# Altium PCB OMD_60V_REF.PcbDoc
Units mm, origin at the board's own origin, x right, y up, seen from the top; angles counter-clockwise.
Board outline 152.4 x 101.6 mm, 4 copper layers (Top Layer, L2, L3, Bottom Layer), stack 1.567 mm thick; 128 components, 119 nets, 652 pads, 0 vias.
Unrouted connection lines stored in the file: 377.
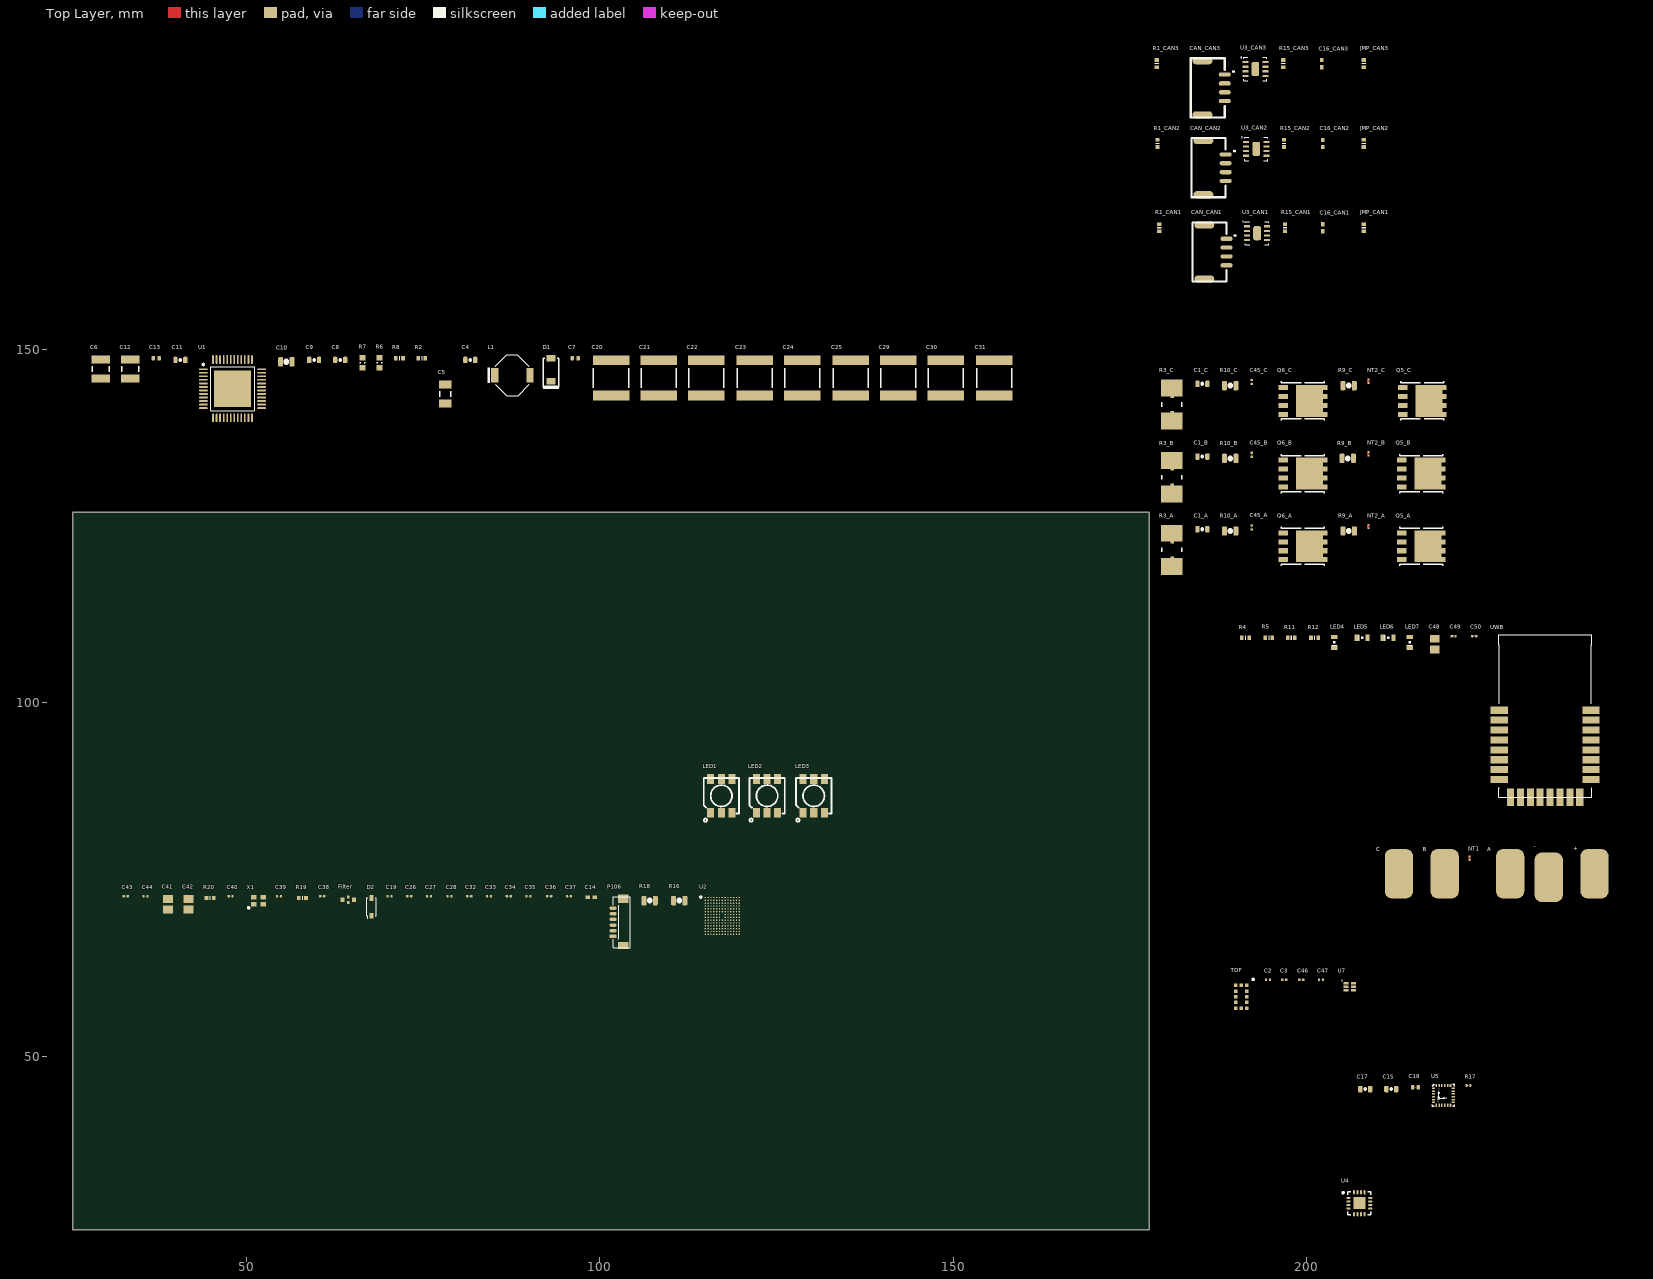
[diagram p0: Top Layer view]
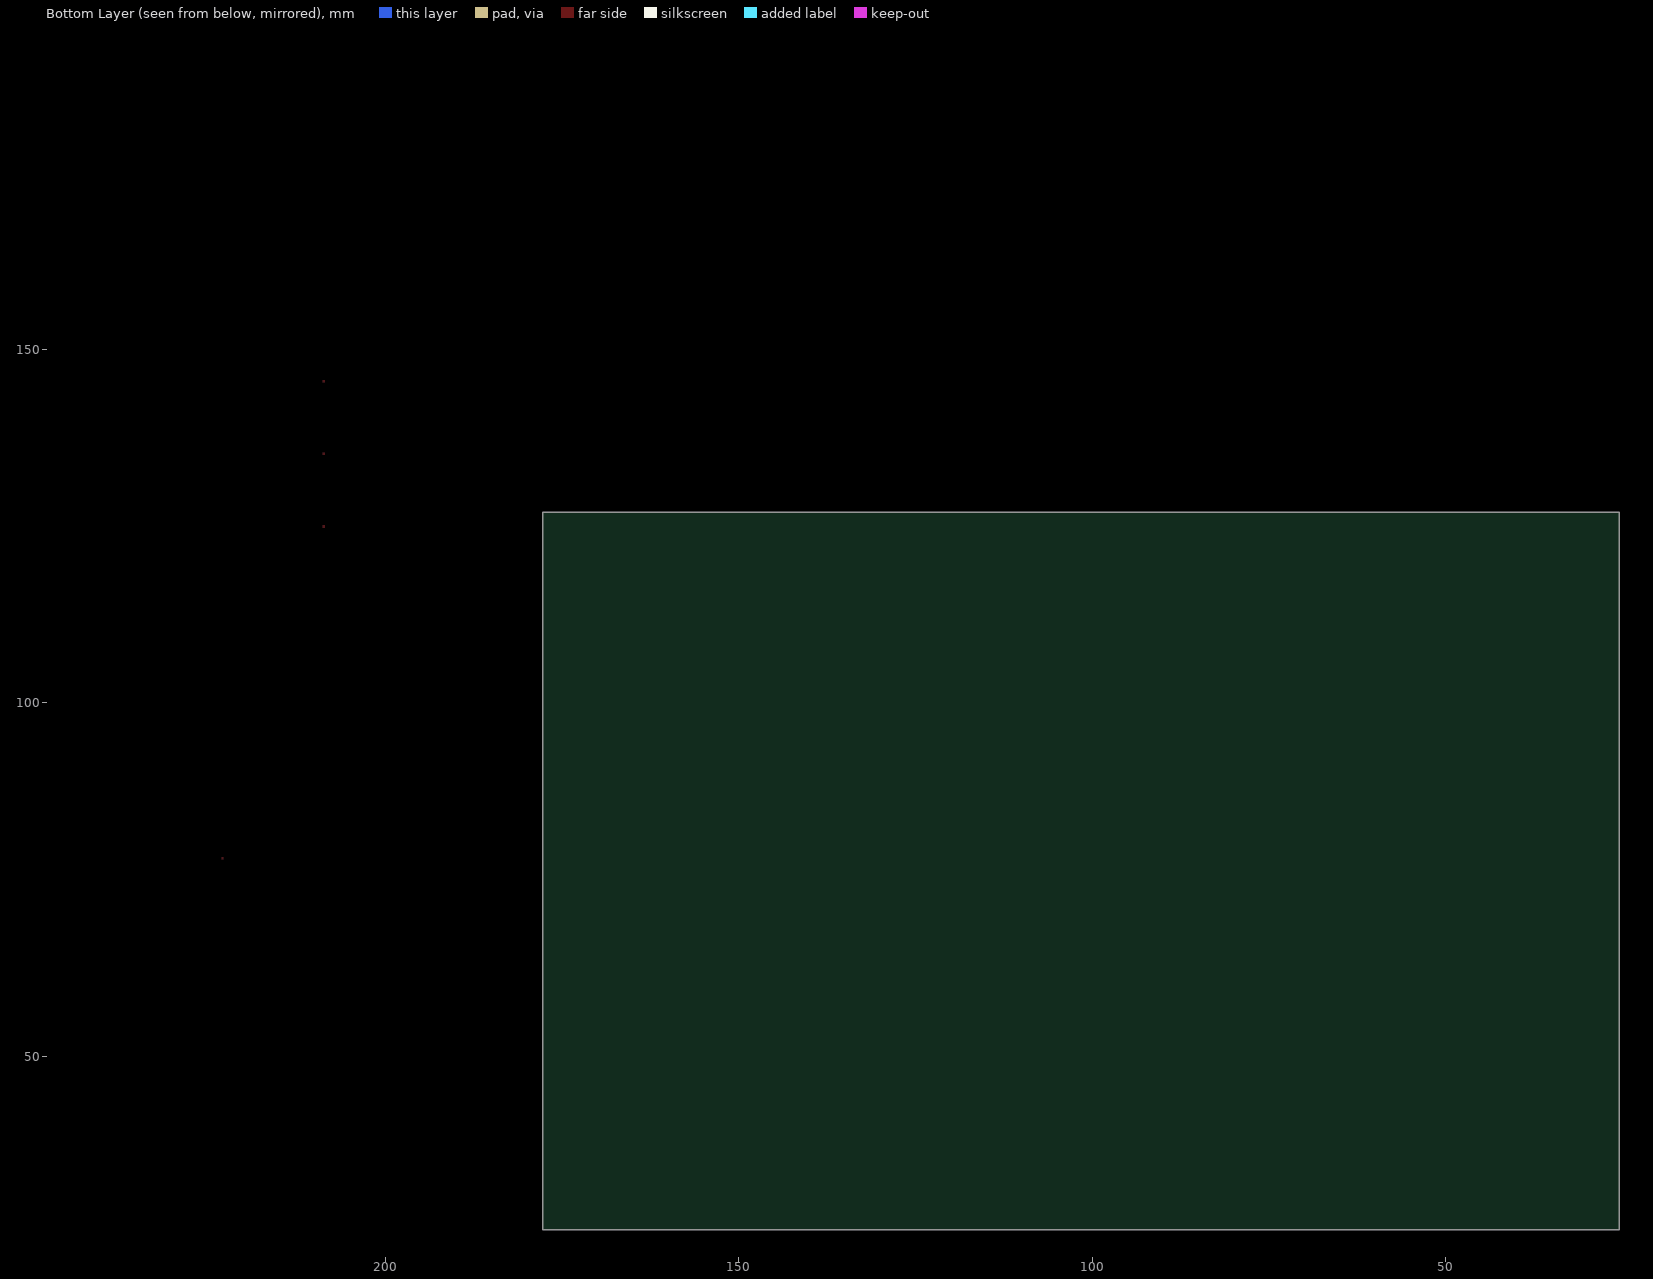
[diagram p1: Bottom Layer view, seen from below]

## Layer stack, top to bottom
Top Solder: solder mask 0.0102, Solder Resist, Dk 3.5
Top Layer: signal copper 0.0356
Dielectric 1: dielectric 0.012, Polyamide, Dk 3.4
L2: signal copper 0.036
Dielectric 4: dielectric 0.012, Polyamide, Dk 3.4
L3: signal copper 0.036
Dielectric 2: core 1.4, FR-4, Dk 4.2
Bottom Layer: signal copper 0.0356
Bottom Solder: solder mask 0.0102, Solder Resist, Dk 3.5

## Board outline
25.4,25.4 177.8,25.4 177.8,127 25.4,127

## Design rules (kind name [scope] priority, off if disabled: settings)
Clearance [All] p1: gap=0.254 ignorepadtopadclearanceinfootprint=FALSE except(0: Arc-Hole Track-Hole SMDPad-Hole THPad-Hole Via-Hole Fill-Hole Poly-Hole Region-Hole Text-Hole)
PolygonConnect [All] p1: connectstyle=Relief reliefconductorwidth=0.254 reliefentries=4 polygonreliefangle="90 Angle" airgapwidth=0.254
RoomDefinition UWB [InComponentClass('UWB')] p1: confinementstyle=ConfineIn formatcopy=TRUE lockcomponents=FALSE outline 190.246,85.205 241.808,85.205 241.808,111.113 190.246,111.113
RoomDefinition TOF [InComponentClass('TOF')] p2: confinementstyle=ConfineIn formatcopy=TRUE lockcomponents=FALSE outline 189.13,55.745 208.053,55.745 208.053,62.476 189.13,62.476
RoomDefinition OMD_F7_CAN_60V_layout [InComponentClass('OMD_F7_CAN_60V_layout')] p3: confinementstyle=ConfineIn formatcopy=TRUE lockcomponents=FALSE outline 209.753,71.526 243.027,71.526 243.027,79.654 209.753,79.654
RoomDefinition LED [InComponentClass('LED')] p4: confinementstyle=ConfineIn formatcopy=TRUE lockcomponents=FALSE outline 111.228,82.918 133.072,82.918 133.072,91.427 111.228,91.427
RoomDefinition IMU [InComponentClass('IMU')] p5: confinementstyle=ConfineIn formatcopy=TRUE lockcomponents=FALSE outline 206.948,42.545 224.093,42.545 224.093,47.498 206.948,47.498
RoomDefinition F7_MCU [InComponentClass('F7_MCU')] p6: confinementstyle=ConfineIn formatcopy=TRUE lockcomponents=FALSE outline 32.123,64.897 120.388,64.897 120.388,74.295 32.123,74.295
RoomDefinition ENC [InComponentClass('ENC')] p7: confinementstyle=ConfineIn formatcopy=TRUE lockcomponents=FALSE outline 204.712,26.898 209.792,26.898 209.792,32.613 204.712,32.613
RoomDefinition DRIVER_60V [InComponentClass('DRIVER_60V')] p8: confinementstyle=ConfineIn formatcopy=TRUE lockcomponents=FALSE outline 27.686,139.399 158.75,139.399 158.75,150.702 27.686,150.702
RoomDefinition CAN3 [InComponentClass('CAN3')] p9: confinementstyle=ConfineIn formatcopy=TRUE lockcomponents=FALSE outline 178.054,182.491 212.344,182.491 212.344,193.032 178.054,193.032
RoomDefinition CAN2 [InComponentClass('CAN2')] p10: confinementstyle=ConfineIn formatcopy=TRUE lockcomponents=FALSE outline 178.181,171.188 212.344,171.188 212.344,181.729 178.181,181.729
RoomDefinition CAN1 [InComponentClass('CAN1')] p11: confinementstyle=ConfineIn formatcopy=TRUE lockcomponents=FALSE outline 178.435,159.25 212.217,159.25 212.217,169.791 178.435,169.791
RoomDefinition C [InComponentClass('C')] p12: confinementstyle=ConfineIn formatcopy=TRUE lockcomponents=FALSE outline 178.943,138.43 220.218,138.43 220.218,147.447 178.943,147.447
RoomDefinition B [InComponentClass('B')] p13: confinementstyle=ConfineIn formatcopy=TRUE lockcomponents=FALSE outline 178.943,128.143 220.091,128.143 220.091,137.16 178.943,137.16
RoomDefinition A [InComponentClass('A')] p14: confinementstyle=ConfineIn formatcopy=TRUE lockcomponents=FALSE outline 178.943,117.856 220.091,117.856 220.091,126.873 178.943,126.873
RoutingVias [All] p1: holewidth=0.711 width=1.27 viastyle="Through Hole" minholewidth=0.711 minwidth=1.27 maxholewidth=0.711 maxwidth=1.27
SolderMaskExpansion [All] p1: expansion=0.102
Width [All] p1: maxlimit=0.254 minlimit=0.254 preferedwidth=0.254
30 further rules are at their usual default settings.

## Classes and differential pairs
component class CAN1: C16_CAN1 CAN_CAN1 JMP_CAN1 R1_CAN1 R15_CAN1 U3_CAN1
component class CAN2: C16_CAN2 CAN_CAN2 JMP_CAN2 R1_CAN2 R15_CAN2 U3_CAN2
component class CAN3: C16_CAN3 CAN_CAN3 JMP_CAN3 R1_CAN3 R15_CAN3 U3_CAN3
component class OMD_F7_CAN_60V_layout: + - A B C NT1
channel class OMD_CAN: CAN1 CAN2 CAN3
component class A: C1_A C45_A NT2_A Q5_A Q6_A R3_A R9_A R10_A
component class B: C1_B C45_B NT2_B Q5_B Q6_B R3_B R9_B R10_B
component class C: C1_C C45_C NT2_C Q5_C Q6_C R3_C R9_C R10_C
component class DRIVER_60V: C4 C5 C6 C7 C8 C9 C10 C11 C12 C13 C20 C21 C22 C23 C24 C25 C29 C30 C31 D1 L1 R2 R6 R7 R8 U1
component class ENC: U4
component class F7_MCU: C14 C19 C26 C27 C28 C32 C33 C34 C35 C36 C37 C38 C39 C40 C41 C42 C43 C44 D2 Filter P106 R16 R18 R19 R20 U2 X1
component class IMU: C15 C17 C18 R17 U5
component class LED: LED1 LED2 LED3
component class TOF: C2 C3 C46 C47 TOF U7
component class UWB: C48 C49 C50 LED4 LED5 LED6 LED7 R4 R5 R11 R12 UWB
channel class OMD_Fets_40A: A B C

## Components (designator, comment, footprint, x,y, rotation, side; value= is the part's Value field where it differs from the comment)
+ "BATT" MOTOR_PLUG_F_3.5 242.265,77.368 r0 top
- "GND" MOTOR_PLUG_F_3.5 235.788,76.86 r0 top
A "Motor_pad" MOTOR_PLUG_F_3.5 230.327,77.368 r0 top
B "Motor_pad" MOTOR_PLUG_F_3.5 221.056,77.368 r0 top
C "Motor_pad" MOTOR_PLUG_F_3.5 214.579,77.368 r0 top
C1_A "PartNumber" 0603-CAP 185.293,124.587 r0 top value=1000pF (schematic designator C1)
C1_B "PartNumber" 0603-CAP 185.293,134.874 r0 top value=1000pF (schematic designator C1)
C1_C "PartNumber" 0603-CAP 185.293,145.161 r0 top value=1000pF (schematic designator C1)
C2 "22uF" 0201-cap 194.591,60.825 r0 top
C3 "4u7" 0201-cap 196.877,60.825 r0 top
C4 "PartNumber" 0603-CAP 81.661,148.543 r0 top value=0.1uF
C5 "PartNumber" 1206_180L 78.105,143.717 r90 top value=22uF
C6 "PartNumber" 1210L 29.337,147.273 r90 top value=2.2uF
C7 "0u1" 0402-CAP 96.52,148.797 r0 top
C8 "PartNumber" 0603-CAP 63.246,148.543 r0 top value=1uF
C9 "PartNumber" 0603-CAP 59.563,148.543 r0 top value=0.047uF
C10 "1u" 0805-CAP 55.626,148.289 r0 top
C11 "PartNumber" 0603-CAP 40.64,148.543 r0 top value=1uF
C12 "PartNumber" 1210_270L 33.528,147.273 r90 top value=4.7uF
C13 "0u1" 0402-CAP 37.211,148.797 r0 top
C14 "CAP CER 10000PF 50V X7R 0402" CAPC1005L 98.798,72.517 r0 top value=10nF
C15 "2u2" 0603-CAP 212.028,45.339 r0 top
C16_CAN1 "Cap" CAPC1005L 202.311,167.251 r90 top value=1uF (schematic designator C16)
C16_CAN2 "Cap" CAPC1005L 202.311,179.189 r90 top value=1uF (schematic designator C16)
C16_CAN3 "Cap" CAPC1005L 202.184,190.492 r90 top value=1uF (schematic designator C16)
C17 "2u2" 0603-CAP 208.345,45.339 r0 top
C18 "0u1" 0402-CAP 215.457,45.593 r0 top
C19 "0u1" 0201-cap 70.223,72.644 r0 top
C20 "Cap" CAPC5750L 101.6,146.003 r90 top value=15uF
C21 "Cap" CAPC5750L 108.331,146.003 r90 top value=15uF
C22 "Cap" CAPC5750L 115.062,146.003 r90 top value=15uF
C23 "Cap" CAPC5750L 121.92,146.003 r90 top value=15uF
C24 "Cap" CAPC5750L 128.651,146.003 r90 top value=15uF
C25 "Cap" CAPC5750L 135.509,146.003 r90 top value=15uF
C26 "0u1" 0201-cap 73.017,72.644 r0 top
C27 "0u1" 0201-cap 75.811,72.644 r0 top
C28 "0u1" 0201-cap 78.732,72.644 r0 top
C29 "Cap" CAPC5750L 142.24,146.003 r90 top value=15uF
C30 "Cap" CAPC5750L 148.971,146.003 r90 top value=15uF
C31 "Cap" CAPC5750L 155.829,146.003 r90 top value=15uF
C32 "0u1" 0201-cap 81.526,72.644 r0 top
C33 "0u1" 0201-cap 84.32,72.644 r0 top
C34 "0u1" 0201-cap 87.114,72.644 r0 top
C35 "0u1" 0201-cap 89.908,72.644 r0 top
C36 "0u1" 0201-cap 92.829,72.644 r0 top
C37 "0u1" 0201-cap 95.623,72.644 r0 top
C38 "0u1" 0201-cap 60.698,72.644 r0 top
C39 "8p" 0201-cap 54.602,72.644 r0 top
C40 "8p" 0201-cap 47.744,72.644 r0 top
C41 "GRM21BR60G107ME15L" C0805 38.854,71.501 r90 top value=100uF
C42 "GRM21BR60G107ME15L" C0805 41.775,71.501 r90 top value=100uF
C43 "2u2" 0201-cap 32.885,72.644 r0 top
C44 "2u2" 0201-cap 35.679,72.644 r0 top
C45_A "0u1" 0201-cap 192.278,124.841 r90 top (schematic designator C45)
C45_B "0u1" 0201-cap 192.278,135.128 r90 top (schematic designator C45)
C45_C "0u1" 0201-cap 192.278,145.415 r90 top (schematic designator C45)
C46 "1u" 0201-cap 199.29,60.825 r0 top
C47 "0u1" 0201-cap 202.084,60.825 r0 top
C48 "GRM21BR60G107ME15L" C0805 218.186,108.319 r90 top value=100uF
C49 "1u" 0201-cap 220.853,109.462 r0 top
C50 "0u1" 0201-cap 223.774,109.462 r0 top
CAN_CAN1 "JST_GH_H4" JST_GH_H4 183.261,163.822 r90 top (schematic designator CAN)
CAN_CAN2 "JST_GH_H4" JST_GH_H4 183.134,175.76 r90 top (schematic designator CAN)
CAN_CAN3 "JST_GH_H4" JST_GH_H4 183.007,187.063 r90 top (schematic designator CAN)
D1 "PartNumber" SOD-123FL 93.091,147.146 r90 top value=100V
D2 "Schottky barrier diode" SOD323 67.683,71.12 r90 top value=30V
Filter "Filter" NFM18CC 64.381,72.136 r0 top value=2.2uF
JMP_CAN1 "solder" R0402 208.153,167.251 r90 top (schematic designator JMP)
JMP_CAN2 "solder" R0402 208.153,179.189 r90 top (schematic designator JMP)
JMP_CAN3 "solder" R0402 208.153,190.492 r90 top (schematic designator JMP)
L1 "PartNumber" SD53 87.63,146.384 r0 top value=15uH
LED1 "?" UBLED 117.197,86.855 r90 top
LED2 "?" UBLED 123.674,86.855 r90 top
LED3 "?" UBLED 130.278,86.855 r90 top
LED4 "AMBER" 0603-LED 203.962,108.573 r90 top
LED5 "AMBER" 0603-LED 207.899,109.208 r0 top
LED6 "AMBER" 0603-LED 211.582,109.208 r0 top
LED7 "AMBER" 0603-LED 214.63,108.573 r90 top
NT1 "Net-Tie" Net-Tie_10mil 223.088,78.003 r90 top net-tie
NT2_A "Net-Tie" Net-Tie_10mil 208.788,124.968 r90 top net-tie (schematic designator NT2)
NT2_B "Net-Tie" Net-Tie_10mil 208.788,135.255 r90 top net-tie (schematic designator NT2)
NT2_C "Net-Tie" Net-Tie_10mil 208.788,145.542 r90 top net-tie (schematic designator NT2)
P106 "JST_SUR_6" JST_SUR_H6 103.878,68.961 r90 top
Q5_A "MOSFET-N" Q5B 216.281,122.174 r0 top (schematic designator Q5)
Q5_B "MOSFET-N" Q5B 216.281,132.461 r0 top (schematic designator Q5)
Q5_C "MOSFET-N" Q5B 216.408,142.748 r0 top (schematic designator Q5)
Q6_A "MOSFET-N" Q5B 199.517,122.174 r0 top (schematic designator Q6)
Q6_B "MOSFET-N" Q5B 199.517,132.461 r0 top (schematic designator Q6)
Q6_C "MOSFET-N" Q5B 199.517,142.748 r0 top (schematic designator Q6)
R1_CAN1 "RES SMD 120 OHM 5% 1/16W 0402" R0402 179.197,167.251 r90 top value=120R (schematic designator R1)
R1_CAN2 "RES SMD 120 OHM 5% 1/16W 0402" R0402 178.943,179.189 r90 top value=120R (schematic designator R1)
R1_CAN3 "RES SMD 120 OHM 5% 1/16W 0402" R0402 178.816,190.492 r90 top value=120R (schematic designator R1)
R2 "RES SMD 10K OHM 5% 1/16W 0402" 0402-RES 74.803,148.797 r0 top value=10K
R3_A "Current sense resistor" 4RESC5125X09N 180.975,121.666 r90 top value=0.001R (schematic designator R3)
R3_B "Current sense resistor" 4RESC5125X09N 180.975,131.953 r90 top value=0.001R (schematic designator R3)
R3_C "Current sense resistor" 4RESC5125X09N 180.975,142.24 r90 top value=0.001R (schematic designator R3)
R4 "220R" 0402-RES 191.389,109.208 r0 top
R5 "220R" 0402-RES 194.691,109.208 r0 top
R6 "PartNumber" 0603L 68.834,148.162 r90 top value=28.0k
R7 "PartNumber" 0603L 66.421,148.162 r90 top value=8.45k
R8 "RES SMD 10K OHM 5% 1/16W 0402" 0402-RES 71.628,148.797 r0 top value=10K
R9_A "RES" R0805 205.994,124.333 r0 top value=18k (schematic designator R9)
R9_B "RES" R0805 205.867,134.62 r0 top value=18k (schematic designator R9)
R9_C "RES" R0805 205.994,144.907 r0 top value=18k (schematic designator R9)
R10_A "RES" R0805 189.23,124.333 r0 top value=1k (schematic designator R10)
R10_B "RES" R0805 189.23,134.62 r0 top value=1k (schematic designator R10)
R10_C "RES" R0805 189.23,144.907 r0 top value=1k (schematic designator R10)
R11 "220R" 0402-RES 197.866,109.208 r0 top
R12 "220R" 0402-RES 201.168,109.208 r0 top
R15_CAN1 "RES SMD 120 OHM 5% 1/16W 0402" R0402 196.977,167.251 r90 top value=120R (schematic designator R15)
R15_CAN2 "RES SMD 120 OHM 5% 1/16W 0402" R0402 196.85,179.189 r90 top value=120R (schematic designator R15)
R15_CAN3 "RES SMD 120 OHM 5% 1/16W 0402" R0402 196.723,190.492 r90 top value=120R (schematic designator R15)
R16 "RES" R0805 111.244,72.009 r0 top value=18k
R17 "3R" 0201-RES 222.95,45.847 r0 top
R18 "RES" R0805 107.053,72.009 r0 top value=1k
R19 "10K" 0402-RES 57.904,72.39 r0 top
R20 "1K" 0402-RES 44.823,72.39 r0 top
TOF "VL53L0X" VL53L0X 190.781,58.412 r90 top
U1 "DRV8323R" PQFP-G48 48.006,144.479 r0 top
U2 "STM32F769AI" WLCSP180 117.34,69.85 r0 top
U3_CAN1 "CAN" SON65P300X100_HS-9N 193.04,166.489 r0 top (schematic designator U3)
U3_CAN2 "CAN" SON65P300X100_HS-9N 192.913,178.427 r0 top (schematic designator U3)
U3_CAN3 "CAN" SON65P300X100_HS-9N 192.786,189.73 r0 top (schematic designator U3)
U4 "MA700" QFN16 207.506,29.184 r0 top
U5 "ICM20649" ICM20649 219.394,44.45 r0 top
U7 "NCV8154" NCV8154 206.148,59.809 r0 top
UWB "DWM1000" DWM1000 233.807,98.159 r0 top
X1 "Crystal Oscillator in SMD 1.6 x 1.2" OSCILLATOR-1.6x1.2 51.681,72.009 r0 top

## Footprints (in the part's own frame and the unit in brackets; to place one, negate y for a bottom-side part, rotate by r counter-clockwise, add the part's x,y. Pads: shape width x height; smd on the part's side, far side on the other; paste and mask are expansions set on the pad)
4RESC5125X09N [mm] "Chip Resistor, 2-Leads + Kelvin terminals, Body 5.1x2.5mm, IPC Medium Density"
  rect 2.4x3.05 smd: 1(-2.35,0) 2(2.35,0)
  rect 0.5x0.5 smd: S1(-1.175,-0.025) S2(1.175,-0.025)
  silkscreen extent -0.3,-1.42 0.3,1.43, body extent -2.67,-1.4 2.66,1.4, height 0.89
0201-cap [mm]
  rrect50% 0.32x0.36 smd mask+0: 1(-0.28,0) 2(0.28,0)
  silkscreen extent 0,-0.01 0,0.03, body extent -0.3,-0.15 0.3,0.15, height 0.3
0201-RES [mm]
  rrect50% 0.32x0.36 smd mask+0: 1(-0.28,0) 2(0.28,0)
  silkscreen extent 0,-0.01 0,0.03, body extent -0.3,-0.15 0.3,0.15, height 0.12
0402-CAP [mil]
  rrect50% 20x24 smd mask+0: P$1(-15.75,0) P$2(15.75,0)
  silkscreen extent 0,0 0,1, body extent -20,-10 20,10, height 20
0402-RES [mil] "0402-RES"
  rect 20x24 smd: 1(-19.68,0) 2(20,0)
  silkscreen extent -3,-12 3,12, body extent -20,-10 20,10, height 20
0603-CAP [mil] "0603-CAP"
  rrect50% 24x36 smd mask+0: 1(-27.56,0) 2(27.56,0)
  silkscreen extent 0,-2 0,2, body extent -31,-16 31,16, height 34
0603-LED [mil]
  rect 24x36 smd: A(30,0) C(-29.53,0)
  silkscreen extent -15,-15 5,15
0603L [mm] "0603 from SM-752 data"
  rect 0.8x0.85 smd: 1(-0.7,0) 2(0.7,0)
  silkscreen extent -0.07,-0.33 0.07,0.33, body extent -0.87,-0.47 0.87,0.47, height 1
0805-CAP [mil]
  rrect50% 28x52 smd mask+0: 1(-31.5,0) 2(31.5,0)
  silkscreen extent 0,-2 0,2, body extent -39,-25 39,25, height 31
1206_180L [mm] "1206_180"
  rect 1.1x1.75 smd: 1(-1.35,0) 2(1.35,0)
  silkscreen extent -0.4,-0.77 0.4,0.77, body extent -1.75,-0.95 1.75,0.95, height 1.8
1210_270L [mm] "1210"
  rect 1.1x2.6 smd: 1(-1.35,0) 2(1.35,0)
  silkscreen extent -0.4,-1.2 0.4,1.2, body extent -1.7,-1.35 1.7,1.35, height 2.7
1210L [mm] "1210 from SM-752 data"
  rect 1.1x2.6 smd: 1(-1.35,0) 2(1.35,0)
  silkscreen extent -0.4,-1.2 0.4,1.2, body extent -1.7,-1.35 1.7,1.35, height 1.35
C0805 [mm] "Chip Capacitor, Body 2.0x1.3mm, IPC High Density"
  rect 1.1x1.4 smd: 1(-0.75,0) 2(0.75,0)
  body extent -1.1,-0.72 1.1,0.72, height 1.4
CAPC1005L [mm] "Chip Capacitor, Body 1.0x0.5mm, IPC High Density"
  rect 0.6x0.5 smd: 1(-0.5,0) 2(0.5,0)
  body extent -0.55,-0.3 0.55,0.3, height 0.6
CAPC5750L [mm] "Chip Capacitor, Body 5.7x5.0mm, IPC High Density"
  rect 1.4x5.2 smd: 1(-2.5,0) 2(2.5,0)
  silkscreen extent -1.4,-2.5 1.4,2.5, body extent -2.95,-2.63 2.95,2.63, height 1.35
DWM1000 [mm] "DWM1000"
  rect 2.45x1 smd mask+0.05: 1(-6.5,0.8) 2(-6.5,-0.6) 3(-6.5,-2) 4(-6.5,-3.4) 5(-6.5,-4.8) 6(-6.5,-6.2) 7(-6.5,-7.6) 8(-6.5,-9) 17(6.5,-9) 18(6.5,-7.6) 19(6.5,-6.2) 20(6.5,-4.8) 21(6.5,-3.4) 22(6.5,-2) 23(6.5,-0.6) 24(6.5,0.8)
  rect 1x2.45 smd mask+0.05: 9(-4.9,-11.5) 10(-3.5,-11.5) 11(-2.1,-11.5) 12(-0.7,-11.5) 13(0.7,-11.5) 14(2.1,-11.5) 15(3.5,-11.5) 16(4.9,-11.5)
  silkscreen extent -6.6,-11.5 6.6,11.5
ICM20649 [mm] "ICM20649"
  rrect70% 0.457x0.229 smd mask+0.05: 1(-1.4,1.016) 6(-1.4,-1) 13(1.4,-1) 18(1.4,1.016)
  rrect50% 0.457x0.229 smd mask+0.05: 2(-1.4,0.61) 3(-1.4,0.203) 4(-1.4,-0.2) 5(-1.4,-0.6) 14(1.4,-0.6) 15(1.4,-0.2) 16(1.4,0.203) 17(1.4,0.61)
  rrect70% 0.229x0.457 smd mask+0.05: 7(-1,-1.4) 12(1.016,-1.4) 24(-1,1.4)
  rrect50% 0.229x0.457 smd mask+0.05: 8(-0.6,-1.4) 9(-0.2,-1.4) 10(0.203,-1.4) 11(0.61,-1.4) 20(0.61,1.4) 21(0.203,1.4) 22(-0.2,1.4) 23(-0.6,1.4)
  rrect90% 0.229x0.457 smd mask+0.05: 19(1.016,1.4)
  silkscreen extent -1.55,-1.55 1.57,1.57
JST_GH_H4 [mil]
  rrect100% 24x67 smd: 1(74,-214.57) 2(25,-214.57) 3(-24.61,-214.57) 4(-73.82,-214.57)
  rrect100% 40x111 smd: GND(-150.59,-90.55) GND(151,-90.55)
  silkscreen extent -164,-215 165,-25, body extent -162,-234 163,-43, height 170
JST_SUR_H6 [mm]
  rect 0.5x1 smd: 1(-2,2)
  rrect100% 0.5x1 smd: 2(-1.2,2) 3(-0.4,2) 4(0.4,2) 5(1.2,2) 6(2,2)
  rect 1x1.5 smd: GND(-3.3,0.585)
  rect 1.2x1.5 smd: GND(3.3,0.585)
  silkscreen extent -3.6,-0.4 3.6,2, body extent -3.5,-0.4 3.5,2.3, height 1.7
MOTOR_PLUG_F_3.5 [mm]
  rrect50% 4x7 smd: 1(-1.473,-1.549)
NCV8154 [mm] "ldo 1.8v 2.8v"
  rect 0.73x0.35 smd: 1(-0.535,0.5) 2(-0.535,0) 3(-0.535,-0.5) 4(0.535,-0.5) 5(0.535,0) 6(0.535,0.5)
  silkscreen extent -1.16,0.84 -1.06,0.94
Net-Tie_10mil [mil] "10mil net tie, no solder mask opening, no solder paste"
  rect 10x10 smd paste-5 mask-5: 1(-10,0) 2(10,0)
  Top Layer region: -6,5 6,5 6,-5 -6,-5
NFM18CC [mm] "Chip Capacitor, 3-Leads, Body 1.6x0.8mm"
  rect 0.55x0.6 smd: 1(-0.825,0) 3(0.825,0)
  rect 0.4x0.4 smd: 2(0,-0.4) 2(0,0.4)
  body extent -0.85,-0.45 0.85,0.45, height 0.7
OSCILLATOR-1.6x1.2 [mm] "OSCILLATOR-1.6x1.2"
  rect 0.75x0.6 smd: 1(-0.675,-0.5) 2(0.675,-0.5) 3(0.675,0.5) 4(-0.675,0.5)
  silkscreen extent -1.5,-1.12 -1.3,-0.91
PQFP-G48 [mm] "TSQFP, 48-Leads, Body 7.00x7.00mm, Pitch 0.50mm, Thermal Pad 5.17x5.17mm, IPC High Density"
  oval 1.25x0.25 smd: 1(-4.125,2.75) 2(-4.125,2.25) 3(-4.125,1.75) 4(-4.125,1.25) 5(-4.125,0.75) 6(-4.125,0.25) 7(-4.125,-0.25) 8(-4.125,-0.75) 9(-4.125,-1.25) 10(-4.125,-1.75) 11(-4.125,-2.25) 12(-4.125,-2.75) 25(4.125,-2.75) 26(4.125,-2.25) 27(4.125,-1.75) 28(4.125,-1.25) 29(4.125,-0.75) 30(4.125,-0.25) 31(4.125,0.25) 32(4.125,0.75) 33(4.125,1.25) 34(4.125,1.75) 35(4.125,2.25) 36(4.125,2.75)
  oval 0.25x1.25 smd: 13(-2.75,-4.125) 14(-2.25,-4.125) 15(-1.75,-4.125) 16(-1.25,-4.125) 17(-0.75,-4.125) 18(-0.25,-4.125) 19(0.25,-4.125) 20(0.75,-4.125) 21(1.25,-4.125) 22(1.75,-4.125) 23(2.25,-4.125) 24(2.75,-4.125) 37(2.75,4.125) 38(2.25,4.125) 39(1.75,4.125) 40(1.25,4.125) 41(0.75,4.125) 42(0.25,4.125) 43(-0.25,4.125) 44(-0.75,4.125) 45(-1.25,4.125) 46(-1.75,4.125) 47(-2.25,4.125) 48(-2.75,4.125)
  rect 5.17x5.17 smd: 49(0,0)
  silkscreen extent -4.25,-3.1 3.1,3.55, body extent -3.5,-3.5 3.5,3.5, height 1.05
Q5B [mm] "TI Q5B, 8-Leads, Body 5.1x6.1mm (max), Pitch 1.27mm, IPC Medium Density"
  rect 3.85x4.52 smd: D(0.95,0)
  rect 1.37x0.71 smd: D(2.77,-1.905) D(2.77,-0.635) D(2.77,0.635) D(2.77,1.905) G(-2.77,-1.905) S(-2.77,-0.635) S(-2.77,0.635) S(-2.77,1.905)
  silkscreen extent -3.05,-2.76 3.05,2.76, body extent -3.05,-2.55 3.05,2.55, height 1.05
QFN16 [mm]
  oval 0.6x0.25 smd: 1(-1.55,0.75) 2(-1.55,0.25) 3(-1.55,-0.25) 4(-1.55,-0.75) 9(1.55,-0.75) 10(1.55,-0.25) 11(1.55,0.25) 12(1.55,0.75)
  oval 0.25x0.6 smd: 5(-0.75,-1.55) 6(-0.25,-1.55) 7(0.25,-1.55) 8(0.75,-1.55) 13(0.75,1.55) 14(0.25,1.55) 15(-0.25,1.55) 16(-0.75,1.55)
  rect 1.7x1.7 smd: 17(0,0)
  silkscreen extent -2.42,-1.65 1.65,1.65, body extent -1.5,-1.5 1.5,1.5, height 0.9
R0402 [mil]
  rect 20x24 smd: 1(-19.69,0) 2(20,0)
  silkscreen extent -3,-12 3,12, body extent -20,-10 20,10, height 12
R0805 [mil]
  rrect50% 28x52 smd mask+0: 1(-31.5,0) 2(31.5,0)
  silkscreen extent 0,-2 0,2, body extent -39,-25 39,24, height 20
SD53 [mm] "COOPER BUSSMAN"
  rect 1x2 smd: 1(-2.5,0) 2(2.5,0)
  silkscreen extent -3.5,-2.9 2.4,2.9, body extent -2.86,-2.86 2.86,2.86, height 3.01
SOD323 [mil] "SOD323"
  rect 32x24 smd: A(50,0) C(-49.21,0)
  silkscreen extent -62,-26 50,26, body extent -49,-24 49,25, height 35
SOD-123FL [mm] "Copied from SOD-123"
  rect 0.915x1.22 smd: 1(-1.637,0) 2(1.637,0)
  silkscreen extent -2.74,-1.16 1.68,1.16, body extent -1.9,-0.9 1.9,0.9, height 1
SON65P300X100_HS-9N [mm] "SON, 8-Leads, Body 3.00x3.00mm, Pitch 0.65mm, Thermal Pad 2.40x1.59mm, IPC Medium Density"
  rect 0.85x0.3 smd: 1(-1.42,0.975) 2(-1.42,0.325) 3(-1.42,-0.325) 4(-1.42,-0.975) 5(1.42,-0.975) 6(1.42,-0.325) 7(1.42,0.325) 8(1.42,0.975)
  rrect50% 1.1x2 smd paste-0.795: 2(0,0)
  silkscreen extent -2.05,-1.65 1.65,1.7, body extent -1.55,-1.55 1.55,1.55, height 1
UBLED [mm]
  rect 1.4x1 smd: 1(-2.4,1.5) 2(-2.4,0) 3(-2.4,-1.5) 4(2.4,1.5) 5(2.4,0) 6(2.4,-1.5)
  silkscreen extent -3.68,-2.5 2.5,2.5, body extent -2.73,-2.61 2.67,2.64, height 1.5
VL53L0X [mm] "LIDAR"
  rect 0.5x0.5 smd: 1(1.6,-0.8) 2(0.8,-0.8) 3(0,-0.8) 4(-0.8,-0.8) 5(-1.6,-0.8) 6(-1.6,0) 7(-1.6,0.8) 8(-0.8,0.8) 9(0,0.8) 10(0.8,0.8) 11(1.6,0.8) 12(1.6,0)
  silkscreen extent 2.34,-1.83 2.59,-1.58, body extent -2.2,-1.2 2.2,1.2, height 1
WLCSP180 [mil] "WLCSP, 180-Leads, Body 5.54x6.09mmx0.58mm, Pitch 0.40mm"
  round 7.5 smd mask+1.57: A1(-94.49,102.36) A2(-78.74,102.36) A3(-62.99,102.36) A4(-47.24,102.36) A5(-31.5,102.36) A6(-15.75,102.36) A7(0,102.36) A8(15.75,102.36) A9(31.5,102.36) A10(47.24,102.36) A11(62.99,102.36) A12(78.74,102.36) A13(94.49,102.36) B1(-94.49,86.61) B2(-78.74,86.61) B3(-62.99,86.61) B4(-47.24,86.61) B5(-31.5,86.61) B6(-15.75,86.61) B7(0,86.61) B8(15.75,86.61) B9(31.5,86.61) B10(47.24,86.61) B11(62.99,86.61) B12(78.74,86.61) B13(94.49,86.61) C1(-94.49,70.87) C2(-78.74,70.87) C3(-62.99,70.87) C4(-47.24,70.87) C5(-31.5,70.87) C6(-15.75,70.87) C7(0,70.87) C8(15.75,70.87) C9(31.5,70.87) C10(47.24,70.87) C11(62.99,70.87) C12(78.74,70.87) C13(94.49,70.87) D1(-94.49,55.12) D2(-78.74,55.12) D3(-62.99,55.12) D4(-47.24,55.12) D5(-31.5,55.12) D6(-15.75,55.12) D7(0,55.12) D8(15.75,55.12) D9(31.5,55.12) D10(47.24,55.12) D11(62.99,55.12) D12(78.74,55.12) D13(94.49,55.12) E1(-94.49,39.37) E2(-78.74,39.37) E3(-62.99,39.37) E4(-47.24,39.37) E5(-31.5,39.37) E6(-15.75,39.37) E7(0,39.37) E8(15.75,39.37) E9(31.5,39.37) E10(47.24,39.37) E11(62.99,39.37) E12(78.74,39.37) E13(94.49,39.37) F1(-94.49,23.62) F2(-78.74,23.62) F3(-62.99,23.62) F4(-47.24,23.62) F5(-31.5,23.62) F6(-15.75,23.62) F7(0,23.62) F8(15.75,23.62) F9(31.5,23.62) F10(47.24,23.62) F11(62.99,23.62) F12(78.74,23.62) F13(94.49,23.62) G1(-94.49,7.87) G2(-78.74,7.87) G3(-62.99,7.87) G4(-47.24,7.87) G5(-31.5,7.87) G6(-15.75,7.87) G8(15.75,7.87) G9(31.5,7.87) G10(47.24,7.87) G11(62.99,7.87) G12(78.74,7.87) G13(94.49,7.87) H1(-94.49,-7.87) H2(-78.74,-7.87) H3(-62.99,-7.87) H4(-47.24,-7.87) H5(-31.5,-7.87) H6(-15.75,-7.87) H8(15.75,-7.87) H9(31.5,-7.87) H10(47.24,-7.87) H11(62.99,-7.87) H12(78.74,-7.87) H13(94.49,-7.87) J1(-94.49,-23.62) J2(-78.74,-23.62) J3(-62.99,-23.62) J4(-47.24,-23.62) J5(-31.5,-23.62) J6(-15.75,-23.62) J7(0,-23.62) J8(15.75,-23.62) J9(31.5,-23.62) J10(47.24,-23.62) J11(62.99,-23.62) J12(78.74,-23.62) J13(94.49,-23.62) K1(-94.49,-39.37) K2(-78.74,-39.37) K3(-62.99,-39.37) K4(-47.24,-39.37) K5(-31.5,-39.37) K6(-15.75,-39.37) K7(0,-39.37) K8(15.75,-39.37) K9(31.5,-39.37) K10(47.24,-39.37) K11(62.99,-39.37) K12(78.74,-39.37) K13(94.49,-39.37) L1(-94.49,-55.12) L2(-78.74,-55.12) L3(-62.99,-55.12) L4(-47.24,-55.12) L5(-31.5,-55.12) L6(-15.75,-55.12) L7(0,-55.12) L8(15.75,-55.12) L9(31.5,-55.12) L10(47.24,-55.12) L11(62.99,-55.12) L12(78.74,-55.12) L13(94.49,-55.12) M1(-94.49,-70.87) M2(-78.74,-70.87) M3(-62.99,-70.87) M4(-47.24,-70.87) M5(-31.5,-70.87) M6(-15.75,-70.87) M7(0,-70.87) M8(15.75,-70.87) M9(31.5,-70.87) M10(47.24,-70.87) M11(62.99,-70.87) M12(78.74,-70.87) M13(94.49,-70.87) N1(-94.49,-86.61) N2(-78.74,-86.61) N3(-62.99,-86.61) N4(-47.24,-86.61) N5(-31.5,-86.61) N6(-15.75,-86.61) N7(0,-86.61) N8(15.75,-86.61) N9(31.5,-86.61) N10(47.24,-86.61) N11(62.99,-86.61) N12(78.74,-86.61) N13(94.49,-86.61) P1(-94.49,-102.36) P2(-78.74,-102.36) P3(-62.99,-102.36) P4(-47.24,-102.36) P5(-31.5,-102.36) P6(-15.75,-102.36) P7(0,-102.36) P8(15.75,-102.36) P9(31.5,-102.36) P10(47.24,-102.36) P11(62.99,-102.36) P12(78.74,-102.36) P13(94.49,-102.36)
  silkscreen extent -125,100 -115,110, body extent -108,-120 110,120

## Part data
+ - A B C: library part Socket, "Socket"
C1_A C1_B C1_C: library part GRM188R71C102KA01D, "CAP, CERM, 1000pF, 16V, +/-10%, X7R, 0603", Supplier Part Number 1=GRM188R71C102KA01D-ND, Supplier 1=Digi-Key
C2: library part CAP0805, "CAP CER 22UF 6.3V X5R 0402", Supplier Part Number 1=478-9839-2-ND, Supplier 1=Digi-Key
C3: library part CAP0603, "CAP CER 4.7UF 6.3V X5R 0201", Supplier Part Number 1=490-13230-2-ND, Supplier 1=Digi-Key
C4: library part 0603YC104JAT2A, "CAP, CERM, 0.1 µF, 16 V, +/- 5%, X7R, 0603", Supplier Part Number 1=478-3726-1-ND, Supplier 1=Digi-Key
C5: library part C3216X7S1A226M160AC, "CAP, CERM, 22 µF, 10 V, +/- 20%, X7S, 1206", Supplier Part Number 1=445-8035-1-ND, Supplier 1=Digi-Key
C6: library part HMK325B7225KN-T, "CAP, CERM, 2.2 µF, 100 V, +/- 10%, X7R, 1210", Supplier Part Number 1=587-1778-1-ND, Supplier 1=Digi-Key
C7 C13: library part CAP0402, "CAP CER 0.1UF 16V Y5V 0402", Supplier Part Number 1=490-10458-2-ND, Supplier 1=Digi-Key
C8 C11: library part GRM188R70J105KA01D, "CAP, CERM, 1 µF, 6.3 V, +/- 10%, X7R, 0603", Supplier Part Number 1=490-3898-1-ND, Supplier 1=Digi-Key
C9: library part C1608X7S2A473K080AB, "CAP, CERM, 0.047 µF, 100 V, +/- 10%, X7S, 0603", Supplier Part Number 1=445-6032-1-ND, Supplier 1=Digi-Key
C10: library part CAP0603, "CAP CER 1UF 16V Y5V 0603", Supplier Part Number 1=490-14464-2-ND, Supplier 1=Digi-Key
C12: library part GRM32ER71K475KE14L, "CAP, CERM, 4.7 µF, 80 V, +/- 10%, X7R, 1210", Supplier Part Number 1=490-9972-1-ND, Supplier 1=Digi-Key
C14: library part Cap, Supplier Part Number 1=445-6893-1-ND, Supplier 1=Digi-Key
C15 C17: library part CAP0603, "CAP CER 2.2UF 16V 10% X6S 0603", Supplier Part Number 1=445-7438-1-ND, Supplier 1=Digi-Key
C16_CAN1 C16_CAN2 C16_CAN3: "CAP CER 1UF 6.3V X5R 0402", Supplier Part Number 1=587-3766-1-ND, Supplier 1=Digi-Key
C18: library part CAP0402, "CAP CER 0.1UF 16V Y5V 0402", Supplier Part Number 1=311-1047-1-ND, Supplier 1=Digi-Key
C19 C26 C27 C28 C32 C33 C34 C35 C36 C37 C38 C45_A C45_B C45_C: library part CAP0402, "CAP CER 0.1UF 6V Y5V 0201", Supplier Part Number 1=490-10404-2-ND, Supplier 1=Digi-Key
C20 C21 C22 C23 C24 C25 C29 C30 C31: "Capacitor", Supplier Part Number 1=80X3236, Supplier 1=Newark
C39 C40: library part CAP0402, "CAP CER 8PF 50V NP0 0201", Supplier Part Number 1=490-13331-1-ND, Supplier 1=Digi-Key
C41 C42 C48: library part Capacitor, Supplier Part Number 1=490-10510-1-ND, Supplier 1=Digi-Key
C43 C44: library part CAP0402, "CAP CER 2u2uF 6V Y5V 0201", Supplier Part Number 1=490-13224-1-ND, Supplier 1=Digi-Key
C46 C49: library part CAP0603, "CAP CER 1UF 6.3V X5R 0201", Supplier Part Number 1=490-7229-2-ND, Supplier 1=Digi-Key
C47 C50: library part CAP0402, "CAP CER 0.1UF 16V Y5V 0402", Supplier Part Number 1=490-10404-2-ND, Supplier 1=Digi-Key
CAN_CAN1 CAN_CAN2 CAN_CAN3: "SM04B-GHS-TB", Supplier Part Number 1=455-1566-2-ND, Supplier 1=Digi-Key
D1: library part MBR1H100SFT3G, "Diode, Schottky, 100 V, 1 A, SOD-123FL", Supplier Part Number 1=MBR1H100SFT3GOSCT-ND, Supplier 1=Digi-Key
D2: library part DIODE-SCHOTTKY_SOD323, "DIODE SCHOTTKY 30V 0.03A SOD323", Supplier Part Number 1=RB751V40T1GOSCT-ND, Supplier 1=Digi-Key
Filter: library part NFM18CC222R1C3, "EMIFIL (Capacitor type) Single Circuit Type for Signal Lines", Supplier Part Number 1=490-6972-1-ND, Supplier 1=Digi-Key
JMP_CAN1 JMP_CAN2 JMP_CAN3: library part Resistor
L1: library part SD53-150-R, "Inductor, Shielded Drum Core, Ferrite, 15 µH, 1.1 A, 0.122 ohm, SMD", Supplier Part Number 1=513-1458-1-ND, Supplier 1=Digi-Key
LED1 LED2 LED3: library part UBLED, Supplier Part Number 1=PC5XS301V0500, Supplier 1=jeff_chang@ubleds.com.tw
LED4 LED5 LED6 LED7: library part LED0603, "LED 1.6X0.8 DOME ORN CLEAR SMD", Supplier Part Number 1=754-1802-1-ND, Supplier 1=Digi-Key
NT1 NT2_A NT2_B NT2_C: "Single point connection between nets."
P106: "Connector, Header, 6Pos, .8mm IDC, R/A, SMD, Tin", Supplier Part Number 1=SM06B-SURS-TF(LF)(SN)-ND, Supplier 1=Digi-Key
Q5_A Q5_B Q5_C Q6_A Q6_B Q6_C: "N-Channel MOSFET", Supplier Part Number 1=296-37194-1-ND, Supplier 1=Digi-Key
R1_CAN1 R1_CAN2 R1_CAN3 R15_CAN1 R15_CAN2 R15_CAN3: library part Resistor, Supplier Part Number 1=311-120JRTR-ND, Supplier 1=Digi-Key
R2 R8: library part Resistor, Supplier Part Number 1=311-10KJRTR-ND, Supplier 1=Digi-Key
R3_A R3_B R3_C: library part WSLP20101L000FEK, "2W, 0.001R 5025 current sense resistor", Supplier Part Number 1=CSNL2010FT1L00CT-ND, Supplier 1=Digi-Key
R4 R5 R11 R12: library part RESISTOR0402-RES, "RES 220 OHM 1/16W 1% 0402 SMD", Supplier Part Number 1=311-220LRCT-ND, Supplier 1=Digi-Key
R6: library part CRCW060328K0FKEA, "RES, 28.0 k, 1%, 0.1 W, 0603", Supplier Part Number 1=541-28.0KHCT-ND, Supplier 1=Digi-Key
R7: library part CRCW06038K45FKEA, "RES, 8.45 k, 1%, 0.1 W, 0603", Supplier Part Number 1=541-8.45KHCT-ND, Supplier 1=Digi-Key
R9_A R9_B R9_C R16: library part R00155, "RES SMD 18K OHM 1% 1/8W 0805", Supplier Part Number 1=311-18.0KCRCT-ND, Supplier 1=Digi-Key
R10_A R10_B R10_C R18: library part R00095, "RES SMD 1K OHM 1% 1/8W 0805", Supplier Part Number 1=311-1.00KCRCT-ND, Supplier 1=Digi-Key
R17: library part RESISTOR0402-RES, "RES 3OHM 1/16W 1% 0201 SMD", Supplier Part Number 1=P3.0AGTR-ND, Supplier 1=Digi-Key
R19: library part RESISTOR0402-RES, "RES 10K OHM 1/16W 1% 0402 SMD", Supplier Part Number 1=311-10.0KLRCT-ND, Supplier 1=Digi-Key
R20: library part RESISTOR0402-RES, "RES 1K OHM 1/16W 1% 0402", Supplier Part Number 1=1276-3430-1-ND, Supplier 1=Digi-Key
TOF: Supplier Part Number 1=497-16538-2-ND, Supplier 1=Digi-Key
U1: Supplier Part Number 1=DRV8323RHRGZR-ND, Supplier 1=Digi-Key
U2: "STM32F7", Supplier Part Number 1=84Y8745, Supplier 1=Newark
U3_CAN1 U3_CAN2 U3_CAN3: Supplier Part Number 1=568-8686-2-ND, Supplier 1=Digi-Key
U4: Supplier Part Number 1=MA700GQ-Z-ND, Supplier 1=Digi-Key
U5: Supplier Part Number 1="Component Distributors Inc. - ICM-20649", Supplier 1=Octopart
U7: "IC REG LDO 1.8v and 2.8v", Supplier Part Number 1=NCV8154MTW180280TCGOSTR-ND, Supplier 1=Digi-Key
UWB: Supplier Part Number 1=1479-1002-2-ND, Supplier 1=Digi-Key
X1: library part OSCILLATOR-3.2X2.5, "CRYSTAL 24MHZ 8PF SMD", Supplier Part Number 1=887-1846-2-ND, Supplier 1=Digi-Key

## Nets (pads, with @x,y where several pads share a name; then routed paths per layer and width w, separated by ;. In a path a pad name is that pad's centre, name@x,y a point inside that pad or via, vN(x,y) a via of type N, cw(c..) or ccw(c..) an arc to the next point about the centre after c; other vN are vias at no path point)
3V3A: Filter.3 U2.M12
5V_MCU: LED1.5 LED2.5 LED3.5
BOOT0: R19.2 U2.A10
CAL: U1.34 U2.N6
ENABLE: U1.33 U2.M6
GND: -.1 C2.2 C3.2 C5.2 C6.2 C7.P$2 C8.2 C11.1 C12.2 C13.P$2 C14.1 C15.2 C16_CAN1.1 C16_CAN2.1 C16_CAN3.1 C17.2 C18.P$2 C19.2 C20.1 C21.1 C22.1 C23.1 C24.1 C25.1 C26.2 C27.2 C28.2 C29.1 C30.1 C31.1 C32.2 C33.2 C34.2 C35.2 C36.2 C37.2 C38.2 C39.2 C40.1 C41.1 C42.1 C43.2 C44.2 C45_A.2 C45_B.2 C45_C.2 C46.2 C47.2 C48.1 C49.2 C50.2 CAN_CAN1.GND CAN_CAN2.GND CAN_CAN3.GND D1.2 Filter.2 LED1.4 LED2.4 LED3.4 P106.6 P106.GND R1_CAN1.2 R1_CAN2.2 R1_CAN3.2 R3_A.2 R3_B.2 R3_C.2 R4.1 R5.1 R7.1 R10_A.2 R10_B.2 R10_C.2 R11.1 R12.1 R18.2 R19.1 TOF.2 TOF.3 TOF.4 TOF.6 TOF.12 U1.2 U1.27 U1.35 U1.43 U1.49 U2.A8 U2.A11 U2.B6 U2.C2 U2.F1 U2.F13 U2.H5 U2.J9 U2.J13 U2.M1 U2.M11 U2.N4 U2.N5 U2.P9 U3_CAN1.2 U3_CAN1.8 U3_CAN2.2 U3_CAN2.8 U3_CAN3.2 U3_CAN3.8 U4.8 U5.11 U5.18 U5.20 U7.1 U7.4 UWB.2 UWB.8 UWB.16 UWB.21 UWB.23 UWB.24 X1.2 X1.4
I_A: U1.25 U2.M13
I_B: U1.24 U2.J11
I_C: U1.23 U2.J10
MCU_BATT_IN: +.1 C6.1 C7.P$1 C10.2 C12.1 C13.P$1 C20.2 C21.2 C22.2 C23.2 C24.2 C25.2 C29.2 C30.2 C31.2 NT1.2 Q5_A.D Q5_B.D Q5_C.D R16.2 U1.6 U1.47 U1.48
NetA_1: A.1 NT2_A.2 Q5_A.S Q6_A.D R9_A.2
NetB_1: B.1 NT2_B.2 Q5_B.S Q6_B.D R9_B.2
NetC1_A_1: C1_A.1 R3_A.S1 U1.11
NetC1_A_2: C1_A.2 R3_A.S2 U1.12
NetC1_B_1: C1_B.1 R3_B.S1 U1.14
NetC1_B_2: C1_B.2 R3_B.S2 U1.13
NetC1_C_1: C1_C.1 R3_C.S1 U1.21
NetC1_C_2: C1_C.2 R3_C.S2 U1.22
NetC2_1: C2.1 C3.1 C46.1 C47.1 TOF.1 TOF.5 TOF.11 U7.5
NetC4_1: C4.1 D1.1 L1.2 U1.45
NetC4_2: C4.2 U1.44
NetC8_1: C8.1 U1.36
NetC9_1: C9.1 U1.3
NetC9_2: C9.2 U1.4
NetC10_1: C10.1 U1.5
NetC16_CAN1_2: C16_CAN1.2 CAN_CAN1.1 U3_CAN1.3
NetC16_CAN2_2: C16_CAN2.2 CAN_CAN2.1 U3_CAN2.3
NetC16_CAN3_2: C16_CAN3.2 CAN_CAN3.1 U3_CAN3.3
NetC17_1: C17.1 U5.10
NetC39_1: C39.1 U2.K12 X1.3
NetC40_2: C40.2 U2.K13 X1.1
NetC41_2: C41.2 C42.2 R20.1
NetC43_1: C43.1 U2.P5
NetC44_1: C44.1 U2.C1
NetC_1: C.1 NT2_C.2 Q5_C.S Q6_C.D R9_C.2
NetCAN_CAN1_2: CAN_CAN1.2 R15_CAN1.2 U3_CAN1.7
NetCAN_CAN1_3: CAN_CAN1.3 JMP_CAN1.1 U3_CAN1.6
NetCAN_CAN1_4: CAN_CAN1.4 R1_CAN1.1
NetCAN_CAN2_2: CAN_CAN2.2 R15_CAN2.2 U3_CAN2.7
NetCAN_CAN2_3: CAN_CAN2.3 JMP_CAN2.1 U3_CAN2.6
NetCAN_CAN2_4: CAN_CAN2.4 R1_CAN2.1
NetCAN_CAN3_2: CAN_CAN3.2 R15_CAN3.2 U3_CAN3.7
NetCAN_CAN3_3: CAN_CAN3.3 JMP_CAN3.1 U3_CAN3.6
NetCAN_CAN3_4: CAN_CAN3.4 R1_CAN3.1
NetD2_C: D2.C R20.2
NetJMP_CAN1_2: JMP_CAN1.2 R15_CAN1.1
NetJMP_CAN2_2: JMP_CAN2.2 R15_CAN2.1
NetJMP_CAN3_2: JMP_CAN3.2 R15_CAN3.1
NetLED1_1: LED1.1 LED2.6
NetLED1_2: LED1.2 LED2.3
NetLED2_1: LED2.1 LED3.6
NetLED2_2: LED2.2 LED3.3
NetLED4_A: LED4.A UWB.12
NetLED4_C: LED4.C R4.2
NetLED5_A: LED5.A UWB.13
NetLED5_C: LED5.C R5.2
NetLED6_A: LED6.A UWB.14
NetLED6_C: LED6.C R11.2
NetLED7_A: LED7.A UWB.15
NetLED7_C: LED7.C R12.2
NetNT1_1: NT1.1 U1.7
NetNT2_A_1: NT2_A.1 U1.9
NetNT2_B_1: NT2_B.1 U1.16
NetNT2_C_1: NT2_C.1 U1.19
NetQ5_A_G: Q5_A.G U1.8
NetQ5_B_G: Q5_B.G U1.17
NetQ5_C_G: Q5_C.G U1.18
NetQ6_A_G: Q6_A.G U1.10
NetQ6_A_S: Q6_A.S R3_A.1
NetQ6_B_G: Q6_B.G U1.15
NetQ6_B_S: Q6_B.S R3_B.1
NetQ6_C_G: Q6_C.G U1.20
NetQ6_C_S: Q6_C.S R3_C.1
NetR6_1: R6.1 R7.2 U1.1
NetR17_2: R17.2 U5.1
NetTOF_9: TOF.9 U2.N11
NetTOF_10: TOF.10 U2.N12
NetU2_D1: U2.D1 U3_CAN1.1
NetU2_D8: U2.D8 U3_CAN3.1
NetU2_E3: U2.E3 U3_CAN1.4
NetU2_E8: U2.E8 U3_CAN3.4
NetU2_H6: U2.H6 U2.J3
NetU2_H8: U2.H8 U3_CAN2.4
NetU2_J5: U2.J5 U3_CAN2.1
NetU2_K8: U2.K8 UWB.10
NetU2_K10: U2.K10 U7.3
NetU2_L8: U2.L8 UWB.22
NetU2_N9: U2.N9 UWB.17
NetU2_P8: U2.P8 UWB.9
nFAULT: R2.2 U1.28 U2.M7
Phase_A_Volt_sense: C45_A.1 R9_A.1 R10_A.1 U2.L9
Phase_B_Volt_sense: C45_B.1 R9_B.1 R10_B.1 U2.P11
Phase_C_Volt_sense: C45_C.1 R9_C.1 R10_C.1 U2.N10
PWM_A_H: U1.37 U2.P7
PWM_A_L: U1.38 U2.N7
PWM_B_H: U1.39 U2.K6
PWM_B_L: U1.40 U2.J6
PWM_C_H: U1.41 U2.P6
PWM_C_L: U1.42 U2.L6
R\S\T\: C38.1 U2.L11
RSTn: U2.K7 UWB.3
SPI1_CS: U2.A7 U5.22
SPI1_MISO: U2.C6 U5.9 UWB.19
SPI1_MOSI: U2.E7 U5.24 UWB.18
SPI1_SCK: U2.B7 U5.23 UWB.20
SPI2_MOSI: LED1.3 U2.D3
SPI2_SCK: LED1.6 U2.B3
SPI4_CS: U1.32 U2.C12
SPI4_CS2: U2.F10 U4.5
SPI4_MISO: R8.2 U1.29 U2.D12 U4.7
SPI4_MOSI: U1.30 U2.E11 U4.4
SPI4_SCK: U1.31 U2.E10 U4.12
SWCLK: P106.5 U2.A3
SWDIO: P106.4 U2.D2
USART1_RX: P106.3 U2.C8
USART1_TX: P106.2 U2.B9
VBAT: D2.A U2.C13
VDD_3V3: C5.1 C11.2 C14.2 C15.1 C18.P$1 C19.1 C26.1 C27.1 C28.1 C32.1 C33.1 C34.1 C35.1 C36.1 C37.1 C48.2 C49.1 C50.1 Filter.1 L1.1 P106.1 R2.1 R6.2 R8.1 R17.1 U1.26 U2.A6 U2.B2 U2.B8 U2.B11 U2.C10 U2.F2 U2.F12 U2.J12 U2.K1 U2.K9 U2.M8 U2.P4 U3_CAN1.5 U3_CAN2.5 U3_CAN3.5 U4.13 U5.8 U5.13 U7.2 UWB.5 UWB.6 UWB.7
VSENSE: R16.1 R18.1 U2.M10
pads on no net: LED3.1 LED3.2 TOF.7 TOF.8 U1.46 U2.A1 U2.A2 U2.A4 U2.A5 U2.A9 U2.A12 U2.A13 U2.B1 U2.B4 U2.B5 U2.B10 U2.B12 U2.B13 U2.C3 U2.C4 U2.C5 U2.C7 U2.C9 U2.C11 U2.D4 U2.D5 U2.D6 U2.D7 U2.D9 U2.D10 U2.D11 U2.D13 U2.E1 U2.E2 U2.E4 U2.E5 U2.E6 U2.E9 U2.E12 U2.E13 U2.F3 U2.F4 U2.F5 U2.F6 U2.F7 U2.F8 U2.F9 U2.F11 U2.G1 U2.G2 U2.G3 U2.G4 U2.G5 U2.G6 U2.G8 U2.G9 U2.G10 U2.G11 U2.G12 U2.G13 U2.H1 U2.H2 U2.H3 U2.H4 U2.H9 U2.H10 U2.H11 U2.H12 U2.H13 U2.J1 U2.J2 U2.J4 U2.J7 U2.J8 U2.K2 U2.K3 U2.K4 U2.K5 U2.K11 U2.L1 U2.L2 U2.L3 U2.L4 U2.L5 U2.L7 U2.L10 U2.L12 U2.L13 U2.M2 U2.M3 U2.M4 U2.M5 U2.M9 U2.N1 U2.N2 U2.N3 U2.N8 U2.N13 U2.P1 U2.P2 U2.P3 U2.P10 U2.P12 U2.P13 U4.1 U4.2 U4.3 U4.6 U4.9 U4.10 U4.11 U4.14 U4.15 U4.16 U4.17 U5.2 U5.3 U5.4 U5.5 U5.6 U5.7 U5.12 U5.14 U5.15 U5.16 U5.17 U5.19 U5.21 U7.6 UWB.1 UWB.4 UWB.11

## Text inside footprints (layer, text, board x,y; h text height)
U5: Top Overlay "Y" at 218.644,45.075 h0.26; Top Overlay "Z" at 218.544,43.525 h0.26; Top Overlay "X" at 219.719,43.925 h0.26